# EAGLE board mini_heatedbed_v1.1 (EAGLE 6.4)
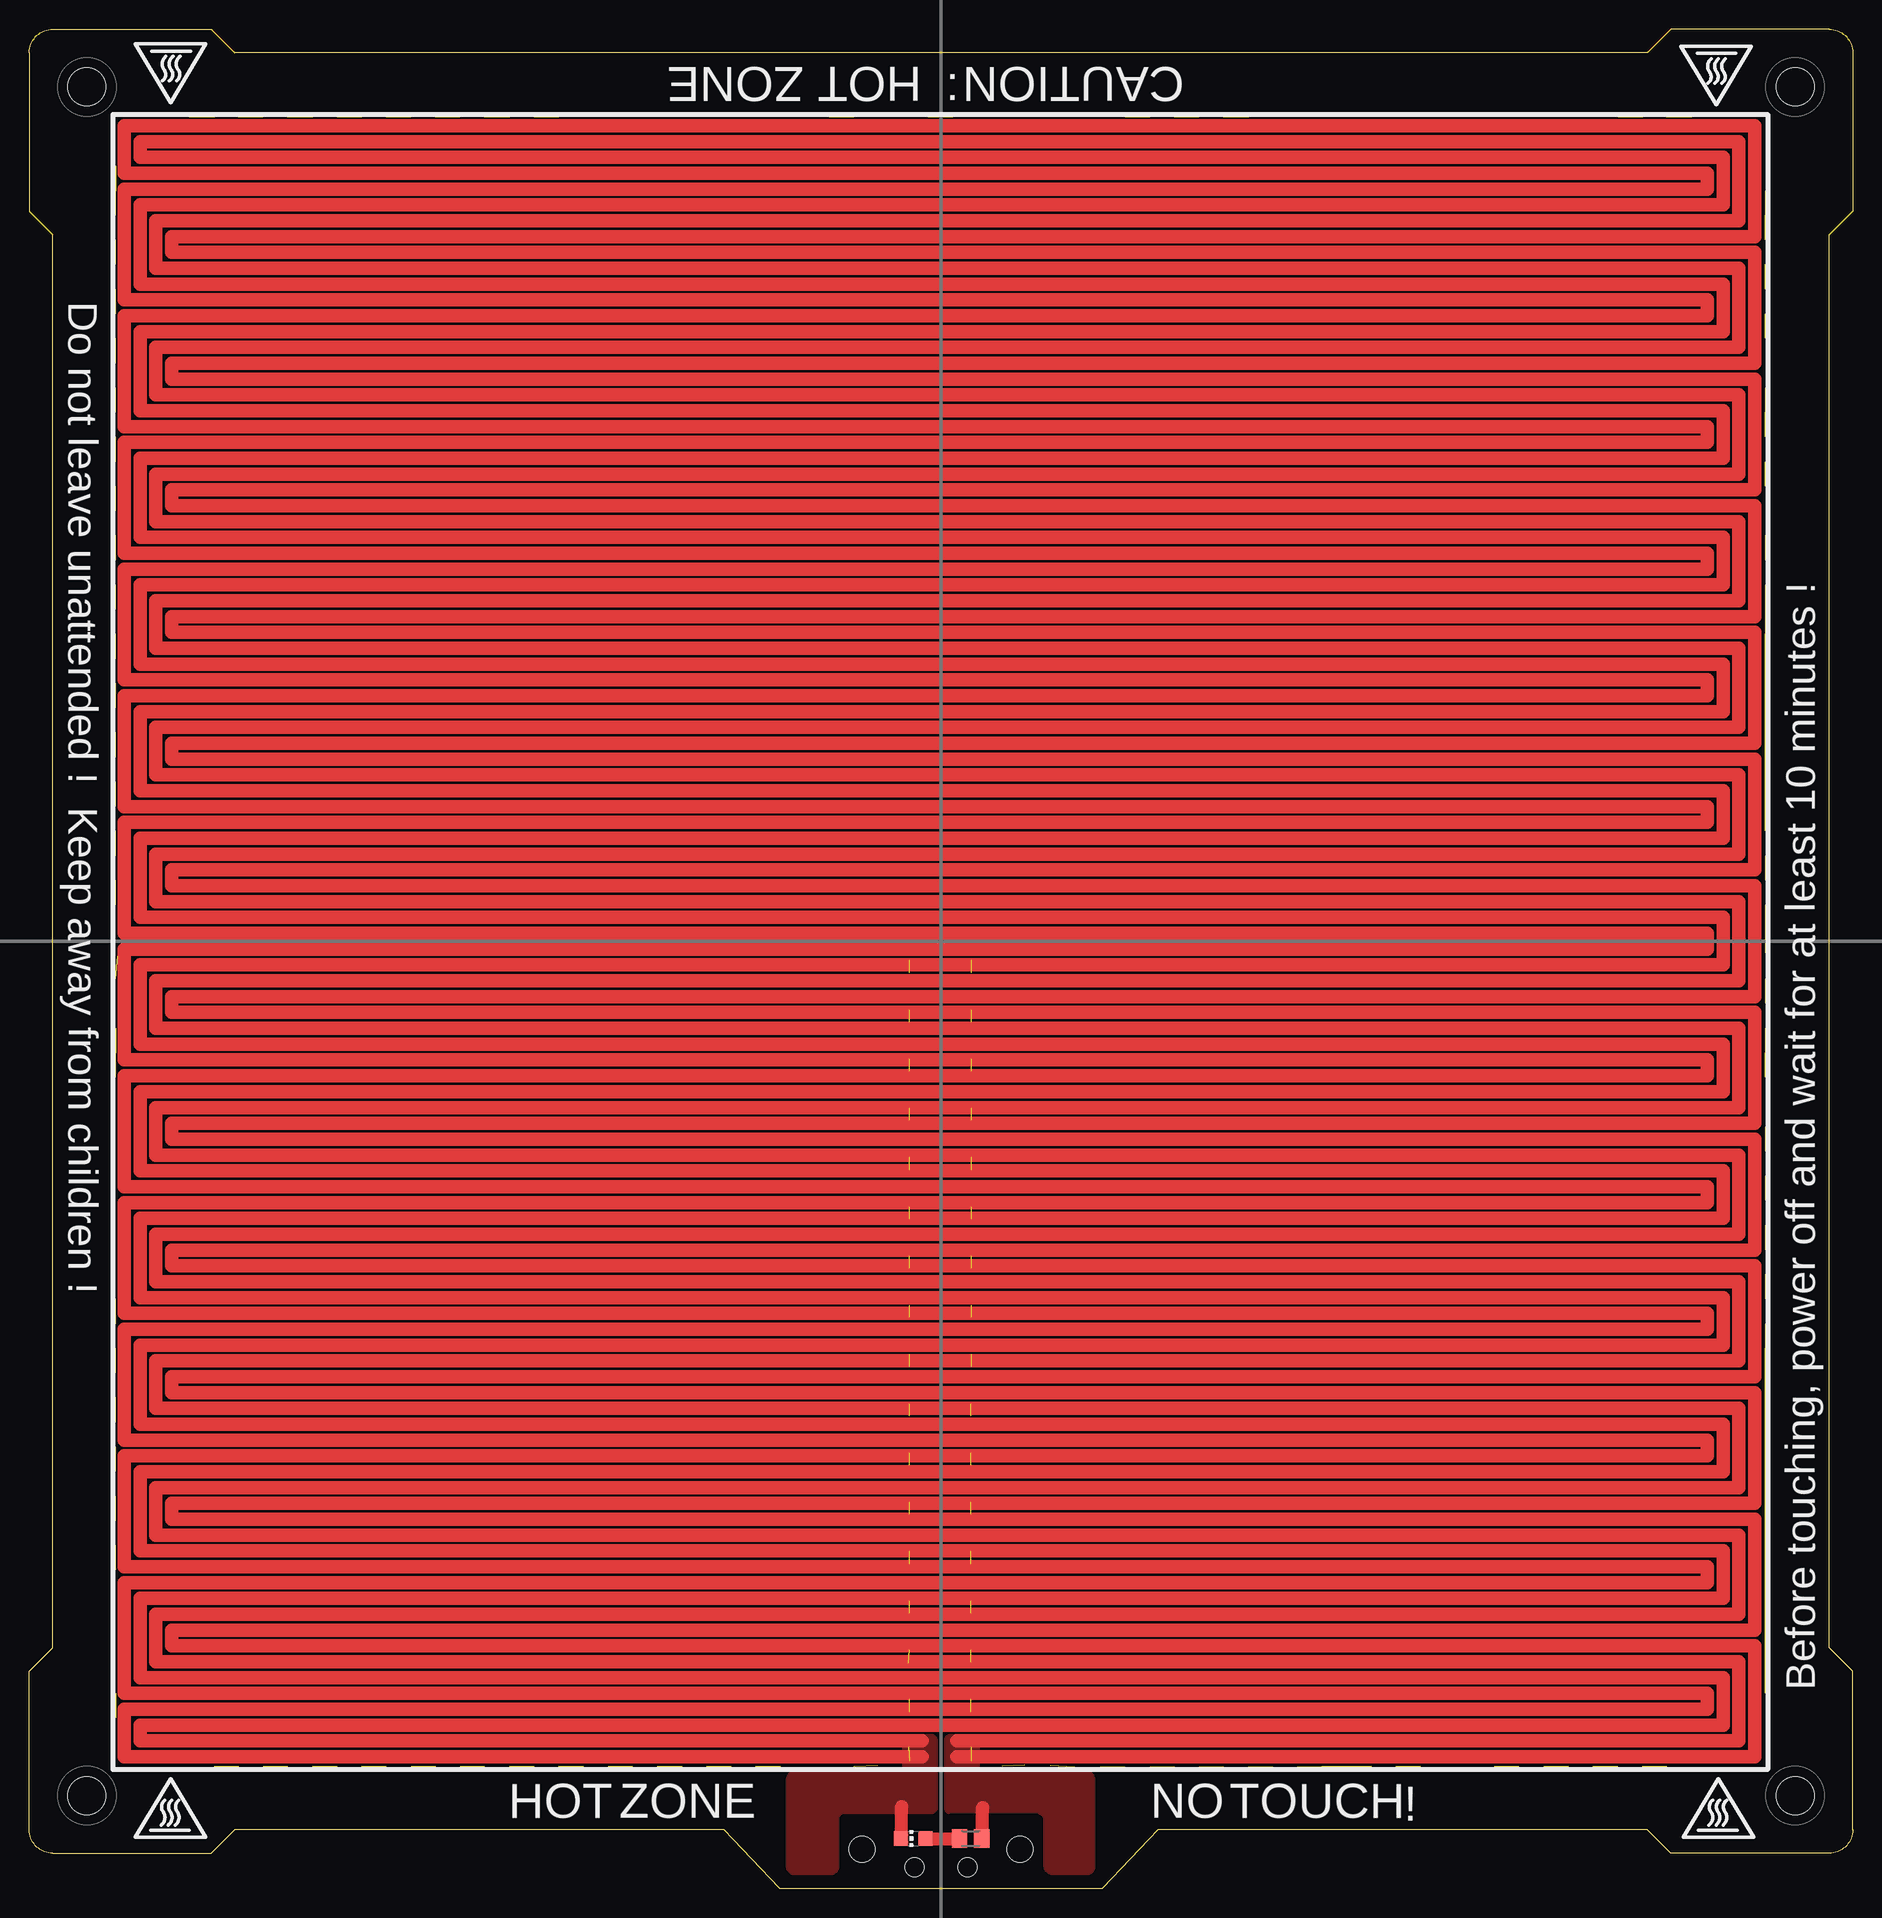
[diagram p0: board, top side]
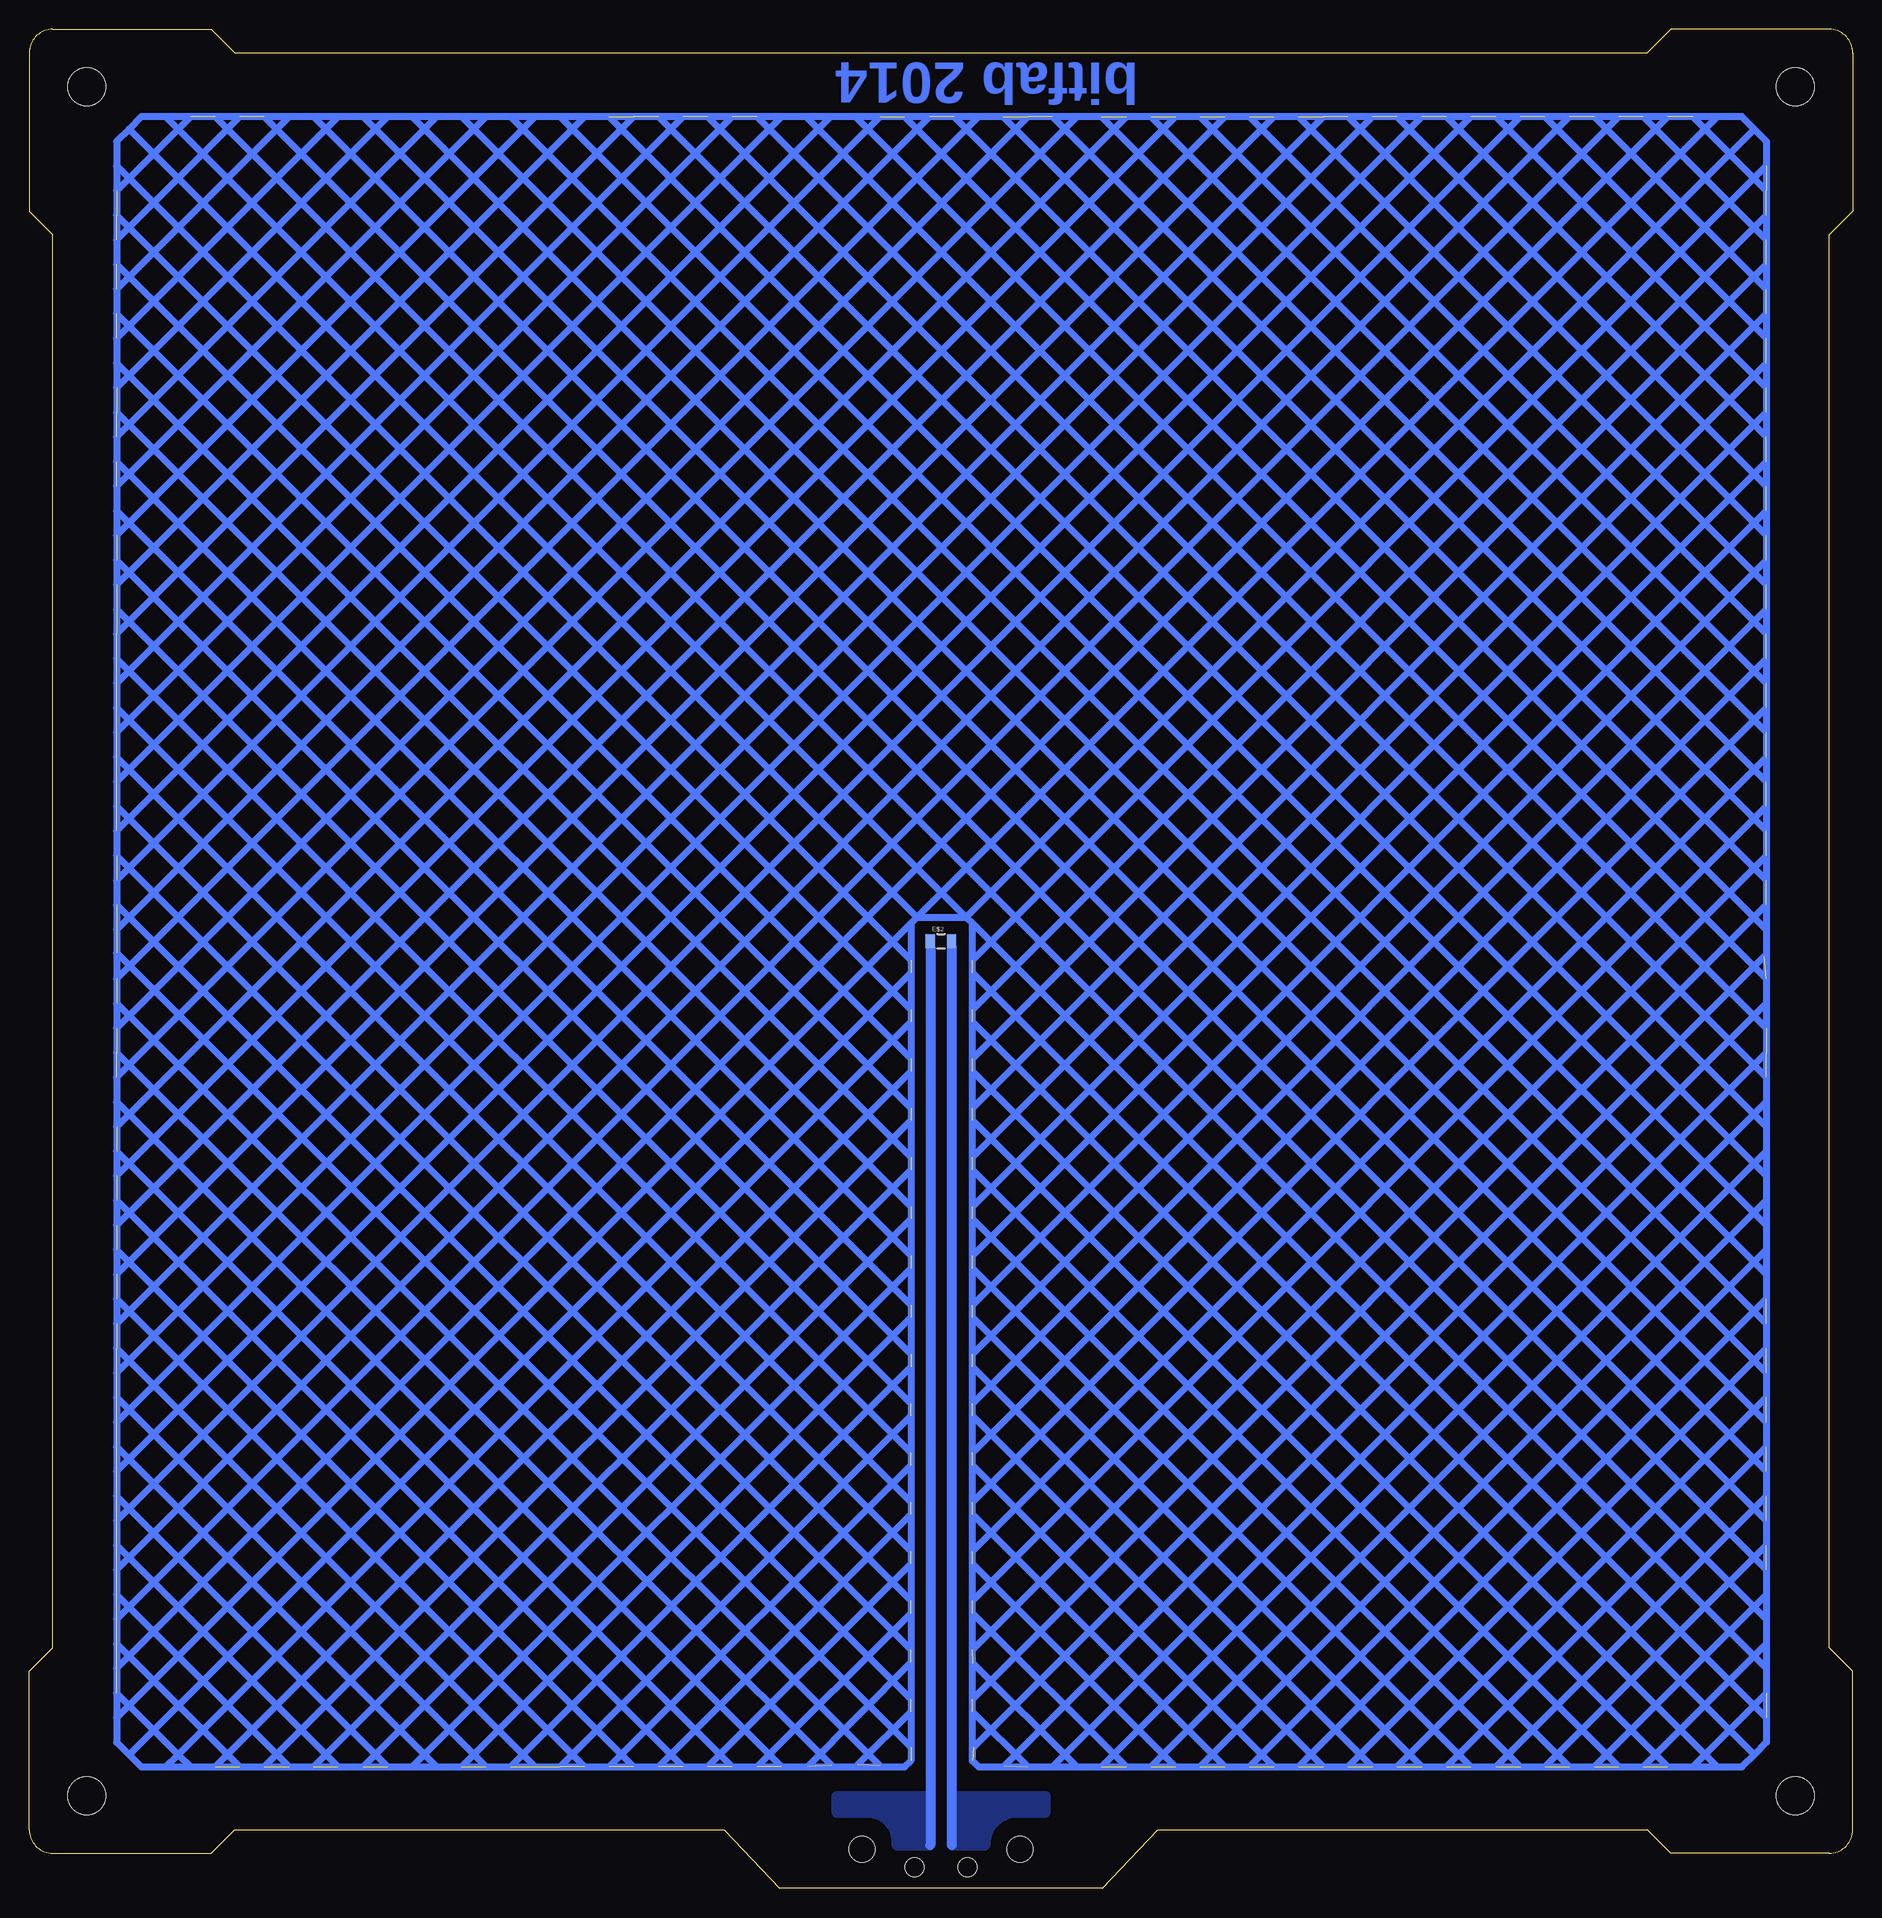
[diagram p1: board, bottom side, seen from below]

Size 155.5 x 158.5 mm. Coordinates in mm from the lower left corner, seen from the top.
Outline: 153.5,20.5 153.5,141 155.5,143 155.5,156.5 arc90 153.5,158.5 140,158.5 138,156.5 17.5,156.5 15.5,158.5 2,158.5 arc90 0,156.5 0,143 2,141 2,20.5 0,18.5 0,5 arc90 2,3 15.5,3 17.5,5 59.25,5 64,0 91.5,0 96.25,5 138,5 140,3 153.5,3 arc90 155.5,5 155.5,18.5 153.5,20.5
Copper layers (1*16): Top 0.035mm / dielectric 1.5mm / Bottom 0.035mm
Design rules "default": minimum track width 10mil, minimum drill 24mil, track to track 8mil, track to pad 8mil, pad to pad 8mil, via to via 8mil, smd to smd 8mil, copper to edge 20mil, drill to drill 8mil, minimum pad ring 10mil, minimum via ring 8mil, stop-mask expansion 4mil, vias tented up to drill 0mil, thermal gap 10mil
Holes 3.2 mm at 4.9,7.9 150.6,7.9 4.9,153.6 150.6,153.6
Holes 2.2 mm at 71,3.35 84.5,3.35
Holes 1.6 mm at 75.5,1.8 80,1.8

## Footprints (pad centres in the part's own frame; a part is rotated, then mirrored left to right if it is on the bottom)
M0805 = smd 1.3 x 1.6: 1 -0.95,0; 2 0.95,0
0805 = smd 0.8 x 1.2: 1 -0.9,0; 2 0.9,0
CHIP-LED0805 = smd 1.2 x 1.2: A 0,-1.05; C 0,1.05

## Placement (x,y rotation side)
1K  [M0805]  80.28,4.25 180 top
E$1  [REPRAP_BSTOP]  63.1,0.8 0 top
E$2  [0805]  77.75,80.75 0 bottom
LED1  [CHIP-LED0805]  75.39,4.25 90 top

## Library data of the parts
1K = resistor
E$1 = ohw-logo
E$2 = SparkFun
LED1 = led

## Nets
N$2: 1K.1

## Tracks (layer width: path | path; a pad name or v marks a point on that pad's centre or on a via)
S$1
  Top 1.1: 74.4,4.3 74.4,7 | 81.3,4.3 81.3,6.9
  Top 1.15: 79.1,11.22 147.15,11.22 147.15,20.68 12.15,20.68 12.15,22.02 147.15,22.02 147.15,31.48 12.15,31.48 12.15,32.83 147.15,32.83 147.15,42.27 12.15,42.27 12.15,43.62 147.15,43.62 147.15,53.08 12.15,53.08 12.15,54.42 147.15,54.42 147.15,63.88 12.15,63.88 12.15,65.22 147.15,65.22 147.15,74.67 12.15,74.67 12.15,76.03 147.15,76.03 147.15,85.47 12.15,85.47 12.15,86.83 147.15,86.83 147.15,96.28 12.15,96.28 12.15,97.62 147.15,97.62 147.15,107.08 12.15,107.08 12.15,108.42 147.15,108.42 147.15,117.88 12.15,117.88 12.15,119.22 147.15,119.22 147.15,128.68 12.15,128.68 12.15,130.03 147.15,130.03 147.15,139.47 12.15,139.47 12.15,140.82 147.15,140.82 147.15,150.28 8.1,150.28 8.1,146.22 143.1,146.22 143.1,144.88 8.1,144.88 8.1,135.43 143.1,135.43 143.1,134.07 8.1,134.07 8.1,124.62 143.1,124.62 143.1,123.28 8.1,123.28 8.1,113.83 143.1,113.83 143.1,112.47 8.1,112.47 8.1,103.03 143.1,103.03 143.1,101.67 8.1,101.67 8.1,92.22 143.1,92.22 143.1,90.88 8.1,90.88 8.1,81.42 143.1,81.42 143.1,80.08 8.1,80.08 8.1,70.62 143.1,70.62 143.1,69.28 8.1,69.28 8.1,59.83 143.1,59.83 143.1,58.48 8.1,58.48 8.1,49.02 143.1,49.02 143.1,47.67 8.1,47.67 8.1,38.23 143.1,38.23 143.1,36.88 8.1,36.88 8.1,27.43 143.1,27.43 143.1,26.07 8.1,26.07 8.1,16.62 143.1,16.62 143.1,15.28 8.1,15.28 8.1,11.22 76.15,11.22 | 79.1,12.57 145.8,12.57 145.8,19.32 10.8,19.32 10.8,23.38 145.8,23.38 145.8,30.12 10.8,30.12 10.8,34.17 145.8,34.17 145.8,40.92 10.8,40.92 10.8,44.98 145.8,44.98 145.8,51.73 10.8,51.73 10.8,55.77 145.8,55.77 145.8,62.52 10.8,62.52 10.8,66.58 145.8,66.58 145.8,73.33 10.8,73.33 10.8,77.38 145.8,77.38 145.8,84.12 10.8,84.12 10.8,88.17 145.8,88.17 145.8,94.92 10.8,94.92 10.8,98.97 145.8,98.97 145.8,105.72 10.8,105.72 10.8,109.78 145.8,109.78 145.8,116.53 10.8,116.53 10.8,120.58 145.8,120.58 145.8,127.33 10.8,127.33 10.8,131.38 145.8,131.38 145.8,138.12 10.8,138.12 10.8,142.18 145.8,142.18 145.8,148.93 9.45,148.93 9.45,147.57 144.45,147.57 144.45,143.53 9.45,143.53 9.45,136.78 144.45,136.78 144.45,132.72 9.45,132.72 9.45,125.97 144.45,125.97 144.45,121.92 9.45,121.92 9.45,115.17 144.45,115.17 144.45,111.12 9.45,111.12 9.45,104.38 144.45,104.38 144.45,100.33 9.45,100.33 9.45,93.58 144.45,93.58 144.45,89.53 9.45,89.53 9.45,82.78 144.45,82.78 144.45,78.72 9.45,78.72 9.45,71.97 144.45,71.97 144.45,67.92 9.45,67.92 9.45,61.17 144.45,61.17 144.45,57.12 9.45,57.12 9.45,50.38 144.45,50.38 144.45,46.33 9.45,46.33 9.45,39.58 144.45,39.58 144.45,35.52 9.45,35.52 9.45,28.77 144.45,28.77 144.45,24.73 9.45,24.73 9.45,17.98 144.45,17.98 144.45,13.93 9.45,13.93 9.45,12.57 76.15,12.57
  pour Top: 78.45,6.35 85.9,6.35 arc-90 86.5,5.85 86.5,1.85 arc90 87.3,1.15 90.2,1.15 arc90 90.9,1.85 90.9,9.26 arc90 89.9,10.15 81.05,10.15 81.05,13.15 78.6,13.15 arc90 78.05,12.71 78.05,6.85 arc90
  pour Top: 64.55,9.26 64.55,1.85 arc90 65.25,1.15 68.35,1.15 arc90 69.05,1.85 69.05,5.85 arc-90 69.45,6.35 76.85,6.35 arc90 77.45,6.85 77.45,12.66 arc90 76.85,13.15 74.45,13.15 74.45,10.15 65.45,10.15 arc90
S$2
  Top 1.1: 76.6,4.25 79.1,4.25
S$3
  Bottom 0.85: 76.85,80.25 76.85,3.7
  pour Bottom: 77.25,8.3 77.25,3.75 arc-90 76.75,3.25 74.03,3.25 arc-90 73.53,3.75 73.53,4 arc90 70.97,6.03 68.92,6.03 arc-90 68.42,6.53 68.42,7.8 arc-90 68.92,8.3
S$4
  Bottom 0.85: 78.65,80.25 78.65,3.7
  pour Bottom: 78.25,8.05 78.25,3.75 arc90 78.75,3.25 81.47,3.25 arc90 81.97,3.75 81.97,4 arc-90 84,6.03 86.58,6.03 arc90 87.08,6.53 87.08,7.8 arc90 86.58,8.3 78.75,8.3 arc90
S$5  (153 unrouted)
  Bottom 0.6: 122.85,151.05 7.35,35.55 | 148.05,35.55 32.55,151.05 | 79.8,82.8 75.6,82.8 | 80.33,78.08 147,11.4 | 143.85,10.35 142.8,11.4 | 142.8,11.4 80.33,73.88 | 80.33,69.67 139.65,10.35 | 135.45,10.35 80.33,65.47 | 80.33,61.27 131.25,10.35 | 127.05,10.35 80.33,57.08 | 80.33,52.88 122.85,10.35 | 118.65,10.35 80.33,48.67 | 114.45,10.35 80.33,44.48 | 110.25,10.35 80.33,40.27 | 106.05,10.35 80.33,36.08 | 101.85,10.35 80.33,31.88 | 97.65,10.35 80.33,27.68 | 93.45,10.35 80.33,23.48 | 89.15,10.35 80.33,19.27 | 79.8,82.8 80.33,82.28 | 80.33,82.28 148.05,14.55 | 79.8,82.8 11.55,151.05 | 148.05,18.75 15.75,151.05 | 75.6,82.8 8.4,150 | 7.35,146.85 75.08,79.12 | 19.95,151.05 148.05,22.95 | 148.05,27.15 24.15,151.05 | 28.35,151.05 148.05,31.35 | 36.75,151.05 148.05,39.75 | 75.6,82.8 143.85,151.05 | 139.65,151.05 7.35,18.75 | 7.35,22.95 135.45,151.05 | 147,150 79.8,82.8 | 75.6,82.8 75.08,82.28 | 75.08,82.28 7.35,14.55 | 8.4,11.4 75.08,78.08 | 80.33,79.12 148.05,146.85 | 148.05,142.65 80.33,74.92 | 148.05,138.45 80.33,70.72 | 148.05,134.25 80.33,66.53 | 148.05,130.05 80.33,62.33 | 148.05,125.85 80.33,58.12 | 148.05,121.65 80.33,53.92 | 148.05,117.45 80.33,49.73 | 148.05,113.25 80.33,45.52 | 148.05,109.05 80.33,41.33 | 11.55,10.35 75.08,73.88 | 15.75,10.35 75.08,69.67 | 19.95,10.35 75.08,65.47 | 24.15,10.35 75.08,61.27 | 28.35,10.35 75.08,57.08 | 32.55,10.35 75.08,52.88 | 36.75,10.35 75.08,48.67 | 40.95,10.35 75.08,44.48 | 45.15,10.35 75.08,40.27 | 49.35,10.35 75.08,36.08 | 53.55,10.35 75.08,31.88 | 57.75,10.35 75.08,27.68 | 61.95,10.35 75.08,23.48 | 80.33,37.12 148.05,104.85 | 148.05,100.65 80.33,32.92 | 148.05,96.45 80.33,28.73 | 80.33,24.52 148.05,92.25 | 131.25,151.05 7.35,27.15 | 7.35,31.35 127.05,151.05
  Bottom 0.6: 7.35,39.75 118.65,151.05 | 114.45,151.05 7.35,43.95 | 7.35,48.15 110.25,151.05 | 106.05,151.05 7.35,52.35 | 7.35,56.55 101.85,151.05 | 97.65,151.05 7.35,60.75 | 7.35,64.95 93.45,151.05 | 148.05,88.05 80.33,20.32 | 80.33,16.12 148.05,83.85 | 148.05,75.45 82.95,10.45 | 148.05,71.25 87.1,10.5 | 91.35,10.35 148.05,67.05 | 148.05,62.85 95.55,10.35 | 99.75,10.35 148.05,58.65 | 148.05,54.45 103.95,10.35 | 108.15,10.35 148.05,50.25 | 148.05,46.05 112.35,10.35 | 116.55,10.35 148.05,41.85 | 120.75,10.35 148.05,37.65 | 124.95,10.35 148.05,33.45 | 129.15,10.35 148.05,29.25 | 133.35,10.35 148.05,25.05 | 137.55,10.35 148.05,20.85 | 142.8,11.4 148.05,16.65 | 142.8,11.4 141.75,10.35 | 147,11.4 148.05,12.45 148.05,148.95 147,150 | 147,11.4 145.95,10.35 122.85,10.35 | 148.05,43.95 40.95,151.05 | 45.15,151.05 148.05,48.15 | 148.05,52.35 49.35,151.05 | 53.55,151.05 148.05,56.55 | 148.05,60.75 57.75,151.05 | 61.95,151.05 148.05,64.95 | 148.05,69.15 66.15,151.05 | 70.35,151.05 148.05,73.35 | 148.05,77.55 74.55,151.05 | 78.75,151.05 148.05,81.75 | 148.05,85.95 82.95,151.05 | 148.05,90.15 87.15,151.05 | 91.35,151.05 148.05,94.35 | 148.05,98.55 95.55,151.05 | 99.75,151.05 148.05,102.75 | 148.05,106.95 103.95,151.05 | 108.15,151.05 148.05,111.15 | 148.05,115.35 112.35,151.05 | 116.55,151.05 148.05,119.55 | 148.05,123.75 120.75,151.05 | 124.95,151.05 148.05,127.95 | 148.05,132.15 129.15,151.05 | 133.35,151.05 148.05,136.35 | 148.05,140.55 137.55,151.05 | 141.75,151.05 148.05,144.75 | 147,150 145.95,151.05 9.45,151.05 8.4,150 | 89.25,151.05 7.35,69.15 | 7.35,73.35 85.05,151.05 | 80.85,151.05 7.35,77.55 | 7.35,81.75 76.65,151.05 | 72.45,151.05 7.35,85.95 | 7.35,90.15 68.25,151.05
  Bottom 0.6: 64.05,151.05 7.35,94.35 | 59.85,151.05 7.35,98.55 | 55.65,151.05 7.35,102.75 | 7.35,106.95 51.45,151.05 | 47.25,151.05 7.35,111.15 | 43.05,151.05 7.35,115.35 | 7.35,119.55 38.85,151.05 | 34.65,151.05 7.35,123.75 | 7.35,127.95 30.45,151.05 | 26.25,151.05 7.35,132.15 | 7.35,136.35 22.05,151.05 | 17.85,151.05 7.35,140.55 | 13.65,151.05 7.35,144.75 | 8.4,150 7.35,148.95 7.35,71.25 | 7.35,142.65 75.08,74.92 | 75.08,70.72 7.35,138.45 | 7.35,134.25 75.08,66.53 | 75.08,62.33 7.35,130.05 | 7.35,125.85 75.08,58.12 | 75.08,53.92 7.35,121.65 | 7.35,117.45 75.08,49.73 | 75.08,45.52 7.35,113.25 | 7.35,109.05 75.08,41.33 | 75.08,37.12 7.35,104.85 | 7.35,100.65 75.08,32.92 | 75.08,28.73 7.35,96.45 | 7.35,92.25 75.08,24.52 | 75.08,20.32 7.35,88.05 | 7.35,83.85 75.08,16.12 | 7.35,75.45 72.35,10.45 | 7.35,67.05 64.05,10.35 | 7.35,62.85 59.85,10.35 | 7.35,58.65 55.65,10.35 | 7.35,54.45 51.45,10.35 | 7.35,50.25 47.25,10.35 | 7.35,46.05 43.05,10.35 | 7.35,41.85 38.85,10.35 | 7.35,37.65 34.65,10.35 | 7.35,33.45 30.45,10.35 | 7.35,29.25 26.25,10.35 | 7.35,25.05 22.05,10.35 | 7.35,20.85 17.85,10.35 | 7.35,16.65 13.65,10.35 | 8.4,11.4 7.35,12.45 7.35,71.25 | 8.4,11.4 9.45,10.35 74.55,10.35 75.08,10.88 75.08,82.28 | 75.08,15.07 70.35,10.35 | 80.33,12.03 148.05,79.75 | 80.33,15.07 84.85,10.55 | 7.55,79.45 74.97,12.03 | 66.15,10.35 75,19.2 | 7.35,71.25 68.25,10.35 | 122.85,10.35 80.85,10.35 80.33,10.88 80.33,82.28

## Text on the board
Bottom: bitfab 2014
tPlace: HOT ZONE | : | CAUTION | Do not leave unattended ! Keep away from children ! | Before touching, power off and wait for at least 10 minutes ! | HOT | ZONE | NO | TOUCH | !
tStop: - | +
bStop: thermistor | heater | DC12V